# Altium PCB DLP.PcbDoc
Units mil, origin at the board's own origin, x right, y up, seen from the top; angles counter-clockwise.
Board outline 6000 x 4000 mil, 2 copper layers (Top Layer, Bottom Layer); 95 components, 260 nets, 636 pads, 98 vias.
Unrouted connection lines stored in the file: 210.
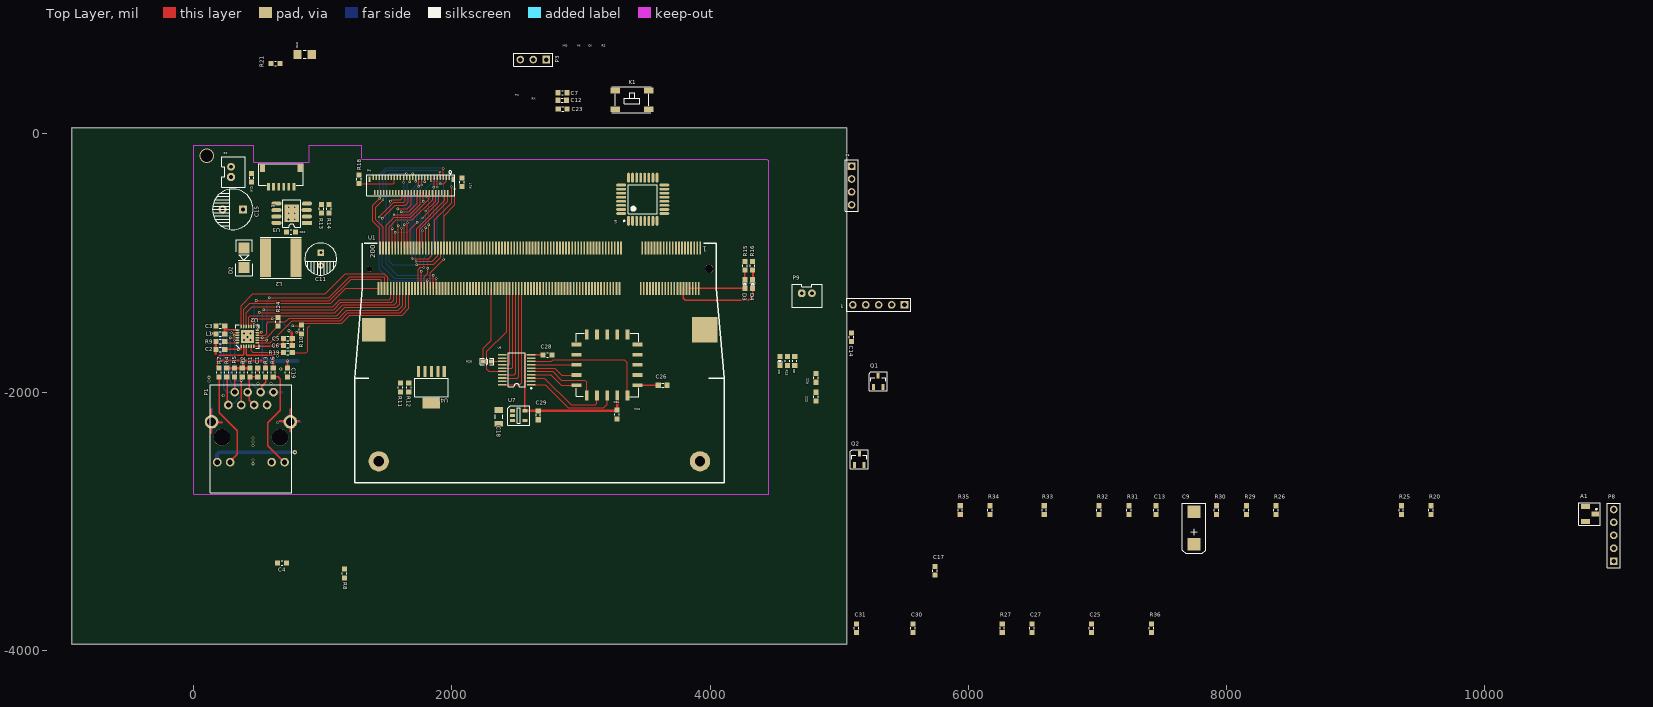
[diagram p0: Top Layer view]
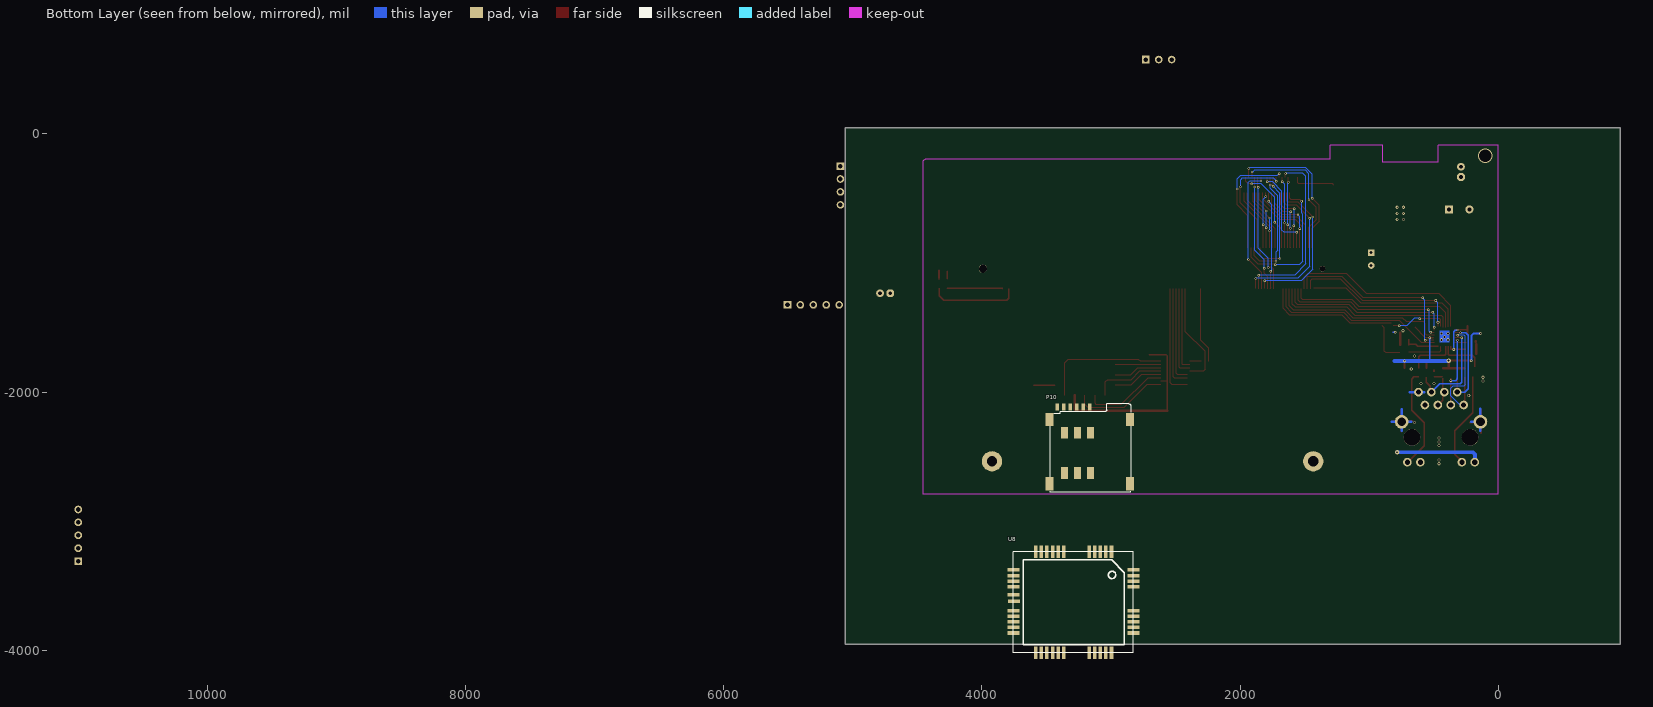
[diagram p1: Bottom Layer view, seen from below]

## Layer stack, top to bottom
Top Solder: solder mask 0.4, Solder Resist, Dk 3.5
Top Layer: signal copper 1.4
Dielectric1: dielectric 12.6, FR-4, Dk 4.8
Bottom Layer: signal copper 1.4
Bottom Solder: solder mask 0.4, Solder Resist, Dk 3.5

## Board outline
-943,-3954 5057,-3954 5057,46 -943,46

## Design rules (kind name [scope] priority, off if disabled: settings)
Clearance [All] p1: gap=6
ComponentClearance [All] p1 off: gap=10 collisioncheckmode=3 verticalgap=10 showdistances=FALSE
FabricationTestPointUsage TestPointUsage [All] p1: valid=0 allowmultiple=FALSE
FabricationTestpoint Testpoint [All] p1: side=3 testpointundercomponent=TRUE minsize=40 maxsize=100 preferedsize=60 minholesize=0 maxholesize=40 preferedholesize=32 testpointgrid=1 allowsidetop=TRUE allowsidebottom=TRUE usegrid=TRUE gridtolerance=0.01
HoleSize [All] p1: absolutevalues=TRUE maxlimit=150 minlimit=1 maxpercent=80.000 minpercent=20.000
PolygonConnect [All] p1: connectstyle=Relief reliefconductorwidth=10 reliefentries=4 polygonreliefangle="90 Angle" airgapwidth=10
RoutingVias [All] p1: holewidth=14 width=28 viastyle="Through Hole" minholewidth=8 minwidth=15 maxholewidth=130 maxwidth=150
SolderMaskExpansion [All] p1: expansion=4
Width [All] p1: maxlimit=100 minlimit=8 preferedwidth=10 minimp=50.000000 maximp=50.000000 favimp=50.000000
26 further rules are at their usual default settings.

## Components (designator, comment, footprint, x,y, rotation, side; value= is the part's Value field where it differs from the comment)
A1 "IPEX" IPEX 10807,-2944 r0 top
C1 "104" 0603 497,-1849 r90 top
C2 "104" 0603 207,-1669 r180 top
C3 "104" 0603 207,-1489 r180 top
C4 "104" 0603 685,-3325 r180 top
C5 "104" 0603 730,-1585 r0 top
C6 "105" 0603 730,-1640 r0 top
C7 "100PF" 0603 2857,318 r180 top
C8 "104" 0603 4655,-1760 r270 top
C9 "Cap Pol3" C7343 7747,-3054 r90 top
C10 "470uF/16V" 3216[1206] 860,615 r0 top
C11 "470uF/16V" C6.3*12 985,-1020 r90 top
C12 "100nF" 0603 2855,260 r180 top
C13 "Cap" 0603 7452,-2914 r90 top
C14 "100nF" 0603 5095,-1575 r90 top
C15 "100uF/35V" C8x4 225,-585 r0 top
C16 "100nF" 0603 450,-340 r270 top
C17 "Cap" 0603 5742,-3384 r90 top
C18 "106" C1206 2364,-2192 r90 top
C19 "104" 0603 727,-1849 r90 top
C20 "10nF" 0603 755,-760 r0 top
C22 "Cap" 0603 4820,-2035 r270 top
C23 "Cap" 0603 2858,191 r0 top
C24 "100NF" 0603 3278,-2173 r90 top
C25 "100NF" 0603 6952,-3829 r90 top
C26 "106" 0603 3632,-1947 r180 top
C27 "106" 0603 6492,-3829 r90 top
C28 "106" 0603 2740,-1712 r0 top
C29 "100NF" 0603 2669,-2180 r270 top
C30 "106" 0603 5572,-3829 r90 top
C31 "106" 0603 5132,-3829 r90 top
D2 "SS34" SMA 390,-960 r270 top
D3 "BLUE" 0603-LED 4269,-1162 r90 top
D4 "BLUE" 0603-LED 4329,-1162 r90 top
D5 "BLUE" 0603-LED 4540,-1760 r270 top
K1 "AJ" 4*4*1.5 3265,335 r0 top
L1 "120 OHM@100MHz" 0603 207,-1549 r180 top
L2 "10uH/4A" 8040 675,-960 r0 top
P1 "HR911105A" HR911105A 417,-2229 r0 top
P2 "CON2" PH2.0-2P 290,-255 r90 top
P3 "" HDR1X3 2730,575 r180 top
P4 "FPC-51PIN" FH26-51S-0.3SHW 1980,-340 r0 top
P5 "DLP-PW" SH1.0-6P 580,-410 r0 top
P6 "CSB" HDR1X4 5095,-250 r270 top
P7 "ISP" HDR1X5 5505,-1325 r180 top
P8 "Header 5" HDR1X5 10997,-3309 r90 top
P9 "CON2" PH2.0-2P 4788,-1235 r0 top
P10 "MircoSIM" "Micro SIM" 3360,-2626 r180 bottom
P11 "CON20" WM8962 3223,-1761 r180 top
Q1 "NPN" SOT-23-NPN 5301,-1917 r0 top
Q2 "NPN" SOT-23-NPN 5155,-2520 r0 top
R1 "10R" 0603 437,-1849 r90 top
R2 "49R9" 0603 377,-1849 r90 top
R3 "49R9" 0603 557,-1849 r90 top
R4 "49R9" 0603 257,-1849 r90 top
R5 "49R9" 0603 317,-1849 r90 top
R6 "1K" 0603 617,-1849 r90 top
R7 "1K" 0603 197,-1849 r90 top
R8 "10K" 0603 1170,-3405 r90 top
R9 "12.1K" 0603 207,-1609 r0 top
R10 "10K" 0603 835,-1515 r270 top
R11 "75K" 0603 1601,-1964 r270 top
R12 "43K" 0603 1666,-1964 r270 top
R13 "4.3KF" 0603 990,-580 r270 top
R14 "1.5KF" 0603 1050,-580 r270 top
R15 "1K" 0603 4269,-1022 r270 top
R16 "1K" 0603 4329,-1022 r270 top
R17 "Res1" 0603 2078,-375 r90 top
R18 "1K" 0603 1282,-352 r270 top
R19 "0R" 0603 730,-1695 r0 top
R20 "Res1" 0603 9582,-2914 r90 top
R21 "1.5K" 0603 635,545 r180 top
R22 "Res1" 0603 4820,-1890 r90 top
R23 "1K" 0603 4600,-1760 r270 top
R24 "10K" 0603 655,-1455 r90 top
R25 "Res1" 0603 9352,-2914 r90 top
R26 "Res1" 0603 8382,-2914 r90 top
R27 "0R" 0603 6262,-3829 r90 top
R28 "33R" 0603R 2272,-1763 r270 top
R29 "Res1" 0603 8152,-2914 r90 top
R30 "Res1" 0603 7922,-2914 r90 top
R31 "Res1" 0603 7242,-2914 r90 top
R32 "Res1" 0603 7012,-2914 r90 top
R33 "Res1" 0603 6587,-2914 r90 top
R34 "Res1" 0603 6167,-2914 r90 top
R35 "Res1" 0603 5937,-2914 r90 top
R36 "1K" 0603 7417,-3829 r90 top
U1 "MAX6-200" "SO-DIMM 200" 2680,-1775 r180 top
U2 "LAN8720A" QFN24_4X4MM 417,-1569 r90 top
U3 "LM22676" SO-8HP 765,-640 r180 top
U4 "TPS73701" SOT223-6 1841,-2084 r180 top
U5 "ATmega48PA" 32A_M 3478,-507 r90 top
U6 "TXS0108" TSSOP-20 2502,-1827 r90 top
U7 "XC6219" SOT23-5N 2518,-2182 r0 top
U8 "G3524" G3524 3055,-3651 r270 bottom

## Footprints (in the part's own frame and the unit in brackets; to place one, negate y for a bottom-side part, rotate by r counter-clockwise, add the part's x,y. Pads: shape width x height; smd on the part's side, far side on the other; paste and mask are expansions set on the pad)
4*4*1.5 [mm]
  rect 1.8x1.1 smd: 1(0,0) 2(6.6,0) 3(0,-3.7) 4(6.6,-3.7)
  silkscreen extent -0.7,-4.4 7.1,0.7
32A_M [mm] "32-Pin Thin Quad Flat Pack 0.8 mm Pitch, IPC Low Density"
  oval 1.95x0.533 smd: 1(-4.25,2.8) 2(-4.25,2) 3(-4.25,1.2) 4(-4.25,0.4) 5(-4.25,-0.4) 6(-4.25,-1.2) 7(-4.25,-2) 8(-4.25,-2.8) 17(4.25,-2.8) 18(4.25,-2) 19(4.25,-1.2) 20(4.25,-0.4) 21(4.25,0.4) 22(4.25,1.2) 23(4.25,2) 24(4.25,2.8)
  oval 0.533x1.95 smd: 9(-2.8,-4.25) 10(-2,-4.25) 11(-1.2,-4.25) 12(-0.4,-4.25) 13(0.4,-4.25) 14(1.2,-4.25) 15(2,-4.25) 16(2.8,-4.25) 25(2.8,4.25) 26(2,4.25) 27(1.2,4.25) 28(0.4,4.25) 29(-0.4,4.25) 30(-1.2,4.25) 31(-2,4.25) 32(-2.8,4.25)
  silkscreen extent -4.37,-2.85 2.85,3.77, body extent -3.5,-3.5 3.5,3.5, height 1.2
0603 [mm]
  rect 1x1 smd: 1(-0.864,0) 2(0.864,0)
  silkscreen extent -0.18,-0.43 0.18,0.43
0603-LED [mm]
  rect 1x1 smd: 1(-0.864,0) 2(0.864,0)
  silkscreen extent -0.18,-0.51 0.18,0.56
0603R [mil]
  rect 31.5x30 smd: 1(0,30) 2(0,-30)
  silkscreen extent -28,-53 28,53
3216[1206] [mm] "Chip Resistor; Body 3.2 x 1.6 mm (LxW typ)"
  rect 1.6x1.8 smd: 1(-1.4,0) 2(1.4,0)
  silkscreen extent -0.3,-0.8 0.3,0.8
8040 [mm]
  rect 2.2x7.5 smd: 1(-3,0) 2(3,0)
  silkscreen extent -4,-4 4,4
C6.3*12 [mm]
  rect 1.3x1.3 hole 0.6: 1(2.54,0)
  round 1.3 hole 0.6: 2(0,0)
  silkscreen extent -1.88,-3.15 4.42,3.15
C8x4 [mm]
  round 1.6 hole 0.8: 1(0,0)
  rect 1.6x1.6 hole 0.8: 2(4,0)
  silkscreen extent -2,-4 6,4
C1206 [mm] "Chip Capacitor, Body 3.2x1.6mm, IPC High Density"
  rect 1.1x1.7 smd: 1(-1.35,0) 2(1.35,0)
  silkscreen extent -0.4,-0.75 0.4,0.75, body extent -1.7,-0.9 1.7,0.9, height 1.3
C7343 [mm] "Molded Capacitor, 2-Leads, Body 7.3x4.3mm, IPC Medium Density"
  rect 2.45x2.5 smd: 1(-3.2,0) 2(3.2,0)
  silkscreen extent -4.95,-2.29 4.95,2.29, body extent -3.75,-2.25 3.75,2.25, height 4.3
FH26-51S-0.3SHW [mm]
  rect 0.45x1 smd: 0(-15.7,-0.3) 0(0.7,-0.3)
  rect 0.3x0.95 smd: 1(0,0.05) 2(-0.3,-2.91) 3(-0.6,0.05) 4(-0.9,-2.91) 5(-1.2,0.05) 6(-1.5,-2.91) 7(-1.8,0.05) 8(-2.1,-2.91) 9(-2.4,0.05) 10(-2.7,-2.91) 11(-3,0.05) 12(-3.3,-2.91) 13(-3.6,0.05) 14(-3.9,-2.91) 15(-4.2,0.05) 16(-4.5,-2.91) 17(-4.8,0.05) 18(-5.1,-2.91) 19(-5.4,0.05) 20(-5.7,-2.91) 21(-6,0.05) 22(-6.3,-2.91) 23(-6.6,0.05) 24(-6.9,-2.91) 25(-7.2,0.05) 26(-7.5,-2.91) 27(-7.8,0.05) 28(-8.1,-2.91) 29(-8.4,0.05) 30(-8.7,-2.91) 31(-9,0.05) 32(-9.3,-2.91) 33(-9.6,0.05) 34(-9.9,-2.91) 35(-10.2,0.05) 36(-10.5,-2.91) 37(-10.8,0.05) 38(-11.1,-2.91) 39(-11.4,0.05) 40(-11.7,-2.91) 41(-12,0.05) 42(-12.3,-2.91) 43(-12.6,0.05) 44(-12.9,-2.91) 45(-13.2,0.05) 46(-13.5,-2.91) 47(-13.8,0.05) 48(-14.1,-2.91) 49(-14.4,0.05) 50(-14.7,-2.91) 51(-15,0.05)
  silkscreen extent -16.2,-3.5 1.1,1.38
G3524 [mm]
  rect 2.4x0.7 smd: 1(-10.55,1.5) 2(-10.55,0.4) 3(-10.55,-0.7) 4(-10.55,-1.8) 5(-10.55,-2.9) 6(-10.55,-7.9) 7(-10.55,-9) 8(-10.55,-10.1) 9(-10.55,-11.2) 10(-10.55,-12.3) 11(-10.55,-13.4) 21(9.35,-13.4) 22(9.35,-12.3) 23(9.35,-11.2) 24(9.35,-10.1) 25(9.35,-9) 26(9.35,-7.9) 27(9.35,-2.9) 28(9.35,-1.8) 29(9.35,-0.7) 30(9.35,0.4) 31(9.35,1.5)
  rect 0.7x2.4 smd: 12(-6.95,-17.75) 13(-5.85,-17.75) 14(-4.75,-17.75) 15(-3.65,-17.75) 16(1.05,-17.75) 17(2.15,-17.75) 18(3.25,-17.75) 19(4.35,-17.75) 20(5.45,-17.75) 32(5.45,5.8) 33(4.35,5.8) 34(3.25,5.8) 35(2.15,5.8) 36(1.05,5.8) 37(-3.65,5.8) 38(-4.75,5.8) 39(-5.85,5.8) 40(-6.95,5.8) 41(-2.1,-17.75) 42(-0.8,-17.7)
  silkscreen extent -10.55,-17.8 9.35,5.8
HDR1X3 [mm] "Connector; Header; 3 Position"
  rect 1.5x1.5 hole 0.9: 1(0,0)
  round 1.5 hole 0.9: 2(2.54,0) 3(5.08,0)
  silkscreen extent -1.27,-1.27 6.35,1.27
HDR1X4 [mm] "Connector; Header; 4 Position"
  rect 1.5x1.5 hole 0.9: 1(0,0)
  round 1.5 hole 0.9: 2(2.54,0) 3(5.08,0) 4(7.62,0)
  silkscreen extent -1.27,-1.27 8.89,1.27
HDR1X5 [mm] "Connector; Header; 5 Position"
  rect 1.5x1.5 hole 0.9: 1(0,0)
  round 1.5 hole 0.9: 2(2.54,0) 3(5.08,0) 4(7.62,0) 5(10.16,0)
  silkscreen extent -1.27,-1.27 11.43,1.27
HR911105A [mm]
  round 1.699 hole 1.001: 1(-3.762,3.275) 2(-2.492,5.815) 3(-1.222,3.275) 4(0.048,5.815) 5(1.318,3.275) 6(2.588,5.815) 7(3.858,3.275) 8(5.128,5.815) 9(-5.937,-7.975) 10(-3.397,-7.975) 11(4.773,-7.975) 12(7.313,-7.975)
  round 2.7 hole 1.7: 13(-7.057,-0.025) 14(8.433,-0.025)
  round 3.3 hole 3.3: ""(-5.027,-3.075) ""(6.403,-3.075)
  silkscreen extent -7.36,-14 8.74,7.3
IPEX [mil] "SOT23, 3-Leads, Body 3.0x2.6mm (max), Pitch 0.95mm, IPC Medium Density"
  rect 59.06x41.34 smd: 1(46.5,-0.5)
  rect 70.87x39.37 smd: 2(-28.5,57.5) 3(-28.5,-57.5)
  silkscreen extent -80,-88 86,88
"Micro SIM" [mm]
  rect 1.55x2.6 smd: 0(-2.95,-2.15) 0(-2.95,10.53) 0(12.85,10.53) 0(12.85,-2.15)
  rect 1.4x2.3 smd: 0(0,0) 0(0,7.92) 0(2.54,0) 0(2.54,7.92) 0(5.08,7.92) 0(5.08,0)
  rect 0.7x1.35 smd: 1(-0.12,12.955) 2(2.42,12.955) 3(4.96,12.955) 5(-1.39,12.955) 6(1.15,12.955) 7(3.69,12.955)
  silkscreen extent -2.82,-3.82 13.05,13.58
PH2.0-2P [mil]
  oct 60x60 hole 30: 1(-78.74,0)
  round 60 hole 30: 2(0,0)
  silkscreen extent -157,-110 79,70
QFN24_4X4MM [mil]
  oval 28x11 smd: 1(-77.01,49.21) 2(-77.01,29.53) 3(-77.01,9.84) 4(-77.01,-9.84) 5(-77.01,-29.53) 6(-77.01,-49.21) 13(77.01,-49.21) 14(77.01,-29.53) 15(77.01,-9.84) 16(77.01,9.84) 17(77.01,29.53) 18(77.01,49.21)
  oval 11x28 smd: 7(-49.21,-77.01) 8(-29.53,-77.01) 9(-9.84,-77.01) 10(9.84,-77.01) 11(29.53,-77.01) 12(49.21,-77.01) 19(49.21,77.01) 20(29.53,77.01) 21(9.84,77.01) 22(-9.84,77.01) 23(-29.53,77.01) 24(-49.21,77.01)
  rect 103x103 smd: 25(0,0)
  silkscreen extent -91,-91 91,91
SH1.0-6P [mm]
  rect 1x1.5 smd: 0(-1.175,3.63) 0(6.175,3.63)
  rect 0.55x1.55 smd: 1(0,0) 2(1,0) 3(2,0) 4(3,0) 5(4,0) 6(5,0)
  silkscreen extent -1.88,0.25 6.88,4.57
SMA [mm] "Molded Diode, 2-Leads, Body 4.3x2.7mm, IPC Medium Density"
  rect 2.15x2.15 smd: 1(-1.93,0) 2(1.93,0)
  silkscreen extent -3.56,-1.65 3.56,1.65, body extent -2.28,-1.42 2.29,1.42, height 2.95
SO-8HP [mm]
  rect 2x0.8 smd: 1(-2.847,1.29)
  oval 2x0.8 smd: 2(-2.847,0.02) 3(-2.813,-1.275) 4(-2.847,-2.52) 5(3.153,-2.52) 6(3.153,-1.25) 7(3.153,0.02) 8(3.153,1.265)
  rect 2.8x3.4 smd: 9(0.128,-0.615)
  silkscreen extent -1.55,-3.31 1.85,2.09
"SO-DIMM 200" [mm]
  round 1.6 hole 1.6: 0(-33.337,-18.553)
  rect 5x5 smd: 0(-32.487,-6.553)
  rect 4.572x4.572 smd: 0(32.613,-6.553)
  round 1.1 hole 1.1: 0(33.463,-18.553)
  rect 0.35x2.55 smd: 1(-31.587,-22.653) 2(-31.287,-14.653) 3(-30.987,-22.653) 4(-30.687,-14.653) 5(-30.387,-22.653) 6(-30.087,-14.653) 7(-29.787,-22.653) 8(-29.487,-14.653) 9(-29.187,-22.653) 10(-28.887,-14.653) 11(-28.587,-22.653) 12(-28.287,-14.653) 13(-27.987,-22.653) 14(-27.687,-14.653) 15(-27.387,-22.653) 16(-27.087,-14.653) 17(-26.787,-22.653) 18(-26.487,-14.653) 19(-26.187,-22.653) 20(-25.887,-14.653) 21(-25.587,-22.653) 22(-25.287,-14.653) 23(-24.987,-22.653) 24(-24.687,-14.653) 25(-24.387,-22.653) 26(-24.087,-14.653) 27(-23.787,-22.653) 28(-23.487,-14.653) 29(-23.187,-22.653) 30(-22.887,-14.653) 31(-22.587,-22.653) 32(-22.287,-14.653) 33(-21.987,-22.653) 34(-21.687,-14.653) 35(-21.387,-22.653) 36(-21.087,-14.653) 37(-20.787,-22.653) 38(-20.487,-14.653) 39(-20.187,-22.653) 40(-19.887,-14.653) 41(-15.987,-22.653) 42(-15.687,-14.653) 43(-15.387,-22.653) 44(-15.087,-14.653) 45(-14.787,-22.653) 46(-14.487,-14.653) 47(-14.187,-22.653) 48(-13.887,-14.653) 49(-13.587,-22.653) 50(-13.287,-14.653) 51(-12.987,-22.653) 52(-12.687,-14.653) 53(-12.387,-22.653) 54(-12.087,-14.653) 55(-11.787,-22.653) 56(-11.487,-14.653) 57(-11.187,-22.653) 58(-10.887,-14.653) 59(-10.587,-22.653) 60(-10.287,-14.653) 61(-9.987,-22.653) 62(-9.687,-14.653) 63(-9.387,-22.653) 64(-9.087,-14.653) 65(-8.787,-22.653) 66(-8.487,-14.653) 67(-8.187,-22.653) 68(-7.887,-14.653) 69(-7.587,-22.653) 70(-7.287,-14.653) 71(-6.987,-22.653) 72(-6.687,-14.653) 73(-6.387,-22.653) 74(-6.087,-14.653) 75(-5.787,-22.653) 76(-5.487,-14.653) 77(-5.187,-22.653) 78(-4.887,-14.653) 79(-4.587,-22.653) 80(-4.287,-14.653) 81(-3.987,-22.653) 82(-3.687,-14.653) 83(-3.387,-22.653) 84(-3.087,-14.653) 85(-2.787,-22.653) 86(-2.487,-14.653) 87(-2.187,-22.653) 88(-1.887,-14.653) 89(-1.587,-22.653) 90(-1.287,-14.653) 91(-0.987,-22.653) 92(-0.687,-14.653) 93(-0.387,-22.653) 94(-0.087,-14.653) 95(0.213,-22.653) 96(0.513,-14.653) 97(0.813,-22.653) 98(1.113,-14.653) 99(1.413,-22.653) 100(1.713,-14.653) 101(2.013,-22.653) 102(2.313,-14.653) 103(2.613,-22.653) 104(2.913,-14.653) 105(3.213,-22.653) 106(3.513,-14.653) 107(3.813,-22.653) 108(4.113,-14.653) 109(4.413,-22.653) 110(4.713,-14.653) 111(5.013,-22.653) 112(5.313,-14.653) 113(5.613,-22.653) 114(5.913,-14.653) 115(6.213,-22.653) 116(6.513,-14.653) 117(6.813,-22.653) 118(7.113,-14.653) 119(7.413,-22.653) 120(7.713,-14.653) 121(8.013,-22.653) 122(8.313,-14.653) 123(8.613,-22.653) 124(8.913,-14.653) 125(9.213,-22.653) 126(9.513,-14.653) 127(9.813,-22.653) 128(10.113,-14.653) 129(10.413,-22.653) 130(10.713,-14.653) 131(11.013,-22.653) 132(11.313,-14.653) 133(11.613,-22.653) 134(11.913,-14.653) 135(12.213,-22.653) 136(12.513,-14.653) 137(12.813,-22.653) 138(13.113,-14.653) 139(13.413,-22.653) 140(13.713,-14.653) 141(14.013,-22.653) 142(14.313,-14.653) 143(14.613,-22.653) 144(14.913,-14.653) 145(15.213,-22.653) 146(15.513,-14.653) 147(15.813,-22.653) 148(16.113,-14.653) 149(16.413,-22.653) 150(16.713,-14.653) 151(17.013,-22.653) 152(17.313,-14.653) 153(17.613,-22.653) 154(17.913,-14.653) 155(18.213,-22.653) 156(18.513,-14.653) 157(18.813,-22.653) 158(19.113,-14.653) 159(19.413,-22.653) 160(19.713,-14.653) 161(20.013,-22.653) 162(20.313,-14.653) 163(20.613,-22.653) 164(20.913,-14.653) 165(21.213,-22.653) 166(21.513,-14.653) 167(21.813,-22.653) 168(22.113,-14.653) 169(22.413,-22.653) 170(22.713,-14.653) 171(23.013,-22.653) 172(23.313,-14.653) 173(23.613,-22.653) 174(23.913,-14.653) 175(24.213,-22.653) 176(24.513,-14.653) 177(24.813,-22.653) 178(25.113,-14.653) 179(25.413,-22.653) 180(25.713,-14.653) 181(26.013,-22.653) 182(26.313,-14.653) 183(26.613,-22.653) 184(26.913,-14.653) 185(27.213,-22.653) 186(27.513,-14.653) 187(27.813,-22.653) 188(28.113,-14.653) 189(28.413,-22.653) 190(28.713,-14.653) 191(29.013,-22.653) 192(29.313,-14.653) 193(29.613,-22.653) 194(29.913,-14.653) 195(30.213,-22.653) 196(30.513,-14.653) 197(30.813,-22.653) 198(31.113,-14.653) 199(31.413,-22.653) 200(31.713,-14.653)
  round 4 hole 2: 201(-31.53,19.336) 202(31.657,19.336)
  silkscreen extent -36.29,-23.55 36.41,23.57
SOT23-5N [mm]
  rect 1.05x0.65 smd: 1(-1.225,0.95) 2(-1.225,0) 3(-1.225,-0.95) 4(1.225,-0.95) 5(1.225,0.95)
  silkscreen extent -2.16,-1.91 2.16,1.91, body extent -0.87,-1.5 0.88,1.5, height 1.1
SOT223-6 [mm]
  rect 0.6x2.2 smd: 1(-2.54,-6.2) 2(-1.27,-6.2) 3(0,-6.2) 4(1.27,-6.2) 5(2.54,-6.2)
  rect 3.5x2.2 smd: 6(0,0)
  silkscreen extent -3.3,-4.9 3.3,-1.17
SOT-23-NPN [mm]
  rect 0.6x1.143 smd: 1(0.95,-1.108) 2(-0.95,-1.108) 3(0,1.108)
  silkscreen extent -1.75,-1.89 1.75,1.87, body extent -1.5,-0.66 1.5,0.74, height 1.1
TSSOP-20 [mm]
  rect 0.3x1.6 smd: 1(-2.925,-2.85) 2(-2.275,-2.85) 3(-1.625,-2.85) 4(-0.975,-2.85) 5(-0.325,-2.85) 6(0.325,-2.85) 7(0.975,-2.85) 8(1.625,-2.85) 9(2.275,-2.85) 10(2.925,-2.85) 11(2.925,2.85) 12(2.275,2.85) 13(1.625,2.85) 14(0.975,2.85) 15(0.325,2.85) 16(-0.325,2.85) 17(-0.975,2.85) 18(-1.625,2.85) 19(-2.275,2.85) 20(-2.925,2.85)
  silkscreen extent -3.75,-2.97 3.3,1.65
WM8962 [mm]
  rect 0.71x2 smd: 1(4.528,6.718) 2(2.528,6.718) 3(0.528,6.718) 4(-1.472,6.718) 5(-3.472,6.718) 11(-3.472,-5.282) 12(-1.472,-5.282) 13(0.528,-5.282) 14(2.528,-5.282) 15(4.528,-5.282)
  rect 2x0.71 smd: 6(-5.472,4.718) 7(-5.472,2.718) 8(-5.472,0.718) 9(-5.472,-1.282) 10(-5.472,-3.282) 16(6.528,-3.282) 17(6.528,-1.282) 18(6.528,0.718) 19(6.528,2.718) 20(6.528,4.718)
  silkscreen extent -5.69,-5.46 6.63,6.96

## Part data
C1 C2 C3 C4 C5 C6 C8 C18 C26 C27 C28 C30 C31: library part CAP
C7 C12 C14 C16 C20: library part Cap, "Capacitor"
C9: "Polarized Capacitor (Surface Mount)"
C10 C11 C15: library part "Cap Pol1", "Polarized Capacitor (Radial)"
C13 C17 C22 C23: "Capacitor"
C19 C24 C25 C29: library part Cap
D2: library part "Diode 1N5408", "3 Amp Medium Power Silicon Rectifier Diode"
D3 D4 D5: library part LED2, "Typical RED, GREEN, YELLOW, AMBER GaAs LED"
K1: library part KEY_1
L1 L2: library part Inductor, "Inductor"
P3: library part CON3, "Connector"
P5: library part "Header 6", "Header, 6-Pin"
P6: library part "Header 4", "Header, 4-Pin"
P7: library part "Header 5", "Header, 5-Pin"
P8: "Header, 5-Pin"
Q1 Q2: library part 2N5551, "NPN General Purpose Amplifier"
R1 R2 R3 R4 R5 R6 R7 R8 R9 R10 R19 R21 R24 R27 R28: library part RES
R11 R12: library part Res2, "Resistor"
R13 R14 R15 R16 R18 R23 R36: library part Res1, "Resistor"
R17 R20 R22 R25 R26 R29 R30 R31 R32 R33 R34 R35: "Resistor"
U4: library part TPS737
U5: library part ATmega8-16AC, "8-Bit AVR Microcontroller with 8K Bytes of In-System Programmable Flash Memory"

## Via types
v1: diameter 18, hole 10, Top Layer to Bottom Layer, 54 vias
v2: diameter 24, hole 15, Top Layer to Bottom Layer, 19 vias
v3: diameter 20, hole 12, Top Layer to Bottom Layer, 13 vias
v4: diameter 23.62, hole 11.81, Top Layer to Bottom Layer, 5 vias
v5: diameter 35, hole 15, Top Layer to Bottom Layer, 2 vias
v6: diameter 23.62, hole 14, Top Layer to Bottom Layer, 1 vias
v7: diameter 110, hole 100, Top Layer to Bottom Layer, 1 vias
v8: diameter 23, hole 13, Top Layer to Bottom Layer, 1 vias
v9: diameter 22, hole 13, Top Layer to Bottom Layer, 1 vias
v10: diameter 22, hole 12, Top Layer to Bottom Layer, 1 vias

## Nets (pads, with @x,y where several pads share a name; then routed paths per layer and width w, separated by ;. In a path a pad name is that pad's centre, name@x,y a point inside that pad or via, vN(x,y) a via of type N, cw(c..) or ccw(c..) an arc to the next point about the centre after c; other vN are vias at no path point)
3P3V: D4.1 U1.12 U1.14 U1.16 U1.18 U4.5 | length 688.3
  Top Layer w10: U1.12 3793.65,-1273.65 3808,-1288 4294,-1288 4329,-1253 D4.1
5VIN: C11.1 C12.2 C18.1 D3.1 L2.2 R13.2 R18.1 U1.2 U1.4 U1.6 U1.8 U1.10 U4.1 | length 429
  Top Layer w12: U1.8 3842.99,-1196 D3.1
+3.3V: C9.1 C13.2 C25.1 U6.19 U8.33 U8.34
+5V: C27.2 C30.1 C31.1 P11.14 U7.1 U7.3
+12: C15.2 C16.2 P2.1 P5.1 P5.2 P5.3 U3.7
AUD3_RXD: U1.114 U6.14 | length 646.3
  Top Layer w8: U6.14 2444.39,-1788.61 2447.19,-1785.81 U1.114
AUD3_TXC: U1.110 U6.17 | length 746
  Top Layer w8: U6.17@2410,-1865.39 2484.61,-1865.39 2494.43,-1855.57 U1.110
AUD3_TXD: U1.112 U6.15 | length 693
  Top Layer w8: U6.15 2463.8,-1814.2 2470.81,-1807.19 U1.112
AUD3_TXFS: U1.116 U6.16 | length 813.6
  Top Layer w8: U6.16 2286.8,-1839.8 2272,-1825 2272,-1685 2423.57,-1533.43 U1.116
AUD_1V8: C24.2 C28.1 C29.1 P11.4 U6.2 U6.10 U7.5 | length 1436.5
  Top Layer w8: 2565,-1916.57 U6.2
  Top Layer w12: U7.5@2563,-2140 2563,-1721 2572.16,-1711.84 C28.1@2703,-1711.84
  Top Layer w20: U7.5@2564,-2145 C24.2@3277,-2145 ; C24.2@3280.96,-2137 P11.4
AUDIO_CLK: R28.1 U6.13 | length 87.8
  Top Layer w8: R28.1 U6.13
CAN1_RX: U1.119
CAN1_TX: U1.117
CAN2_RX: U1.124
CAN2_TX: U1.122
CLK1_N: U1.84
CLK1_P: U1.82
CPUSYNC: P4.1 R17.2
CSB_CS: P6.3 U5.11
CSB_SIG: P6.2 U5.12
CSI0_DAT12: U1.107
CSI0_DAT13: U1.105
CSI0_DAT14: U1.99
CSI0_DAT15: U1.115
CSI0_DAT16: U1.97
CSI0_DAT17: U1.95
CSI0_DAT18: U1.103
CSI0_DAT19: U1.101
CSI0_DATA_EN/VOL-: U1.24
CSI0_HSYNCH: U1.113
CSI0_PIXCLK: U1.111
CSI0_VSYNCH: U1.109
CSI_CLK0M: U1.85
CSI_CLK0P: U1.87
CSI_D0M: U1.81
CSI_D0P: U1.83
CSI_D1M: U1.77
CSI_D1P: U1.79
CSPI1_CLK: U1.47
CSPI1_CS0: U1.41
CSPI1_MISO: U1.43
CSPI1_MOSI: U1.45
CSPI1_RDY: U1.49
CSPI2_CLK: U1.31
CSPI2_CS0: U1.25
CSPI2_CS1: U1.33
CSPI2_MISO: U1.35
CSPI2_MOSI: U1.29
CSPI2_RDY: U1.27
DISP0_CLK: P4.3 U1.179 | length 718.8
  Top Layer w8: U1.179 1679.47,-737.53 v1(1732,-685) ; v1(1909,-388) 1936.67,-388 1956.38,-368.29 P4.3
  Bottom Layer w8: v1(1732,-685) 1732,-492 1836,-388 v1(1909,-388)
DISP0_CONTRAST: U1.177
DISP0_DAT0: P4.7 U1.197 | length 1122.1
  Top Layer w8: U1.197 1466.87,-724.87 1409,-667 1409,-568.87 v1(1466.87,-511) ; v1(1907.5,-296) 1907.5,-336.4 P4.7
  Bottom Layer w8: v1(1466.87,-511) 1466.87,-308.13 1492,-283 1891,-283 1904,-296 v1(1907.5,-296)
DISP0_DAT1: P4.8 U1.171 | length 478.8
  Top Layer w8: U1.171@1772.5,-881.68 v1(1772.5,-750) ; v1(1772.5,-652.5) 1897.32,-527.68 P4.8
  Bottom Layer w8: v1(1772.5,-750) v1(1772.5,-652.5)
DISP0_DAT2: P4.9 U1.170 | length 900.5
  Top Layer w8: U1.170 1785.77,-1106.23 1813,-1079 v1(1813,-1042) ; v1@1885.51,-410.51 P4.9
  Bottom Layer w8: v1(1813,-1042) 1813,-977 1887,-903 v1(1887,-412)
DISP0_DAT3: P4.10 U1.169 | length 460.1
  Top Layer w8: U1.169 v1(1797.58,-727.42) ; v1(1797.58,-597.42) 1873.7,-521.3 P4.10
  Bottom Layer w8: v1(1797.58,-727.42) v1(1797.58,-597.42)
DISP0_DAT4: P4.11 U1.174 | length 924.9
  Top Layer w8: U1.174 1738.53,-1050.47 1754,-1035 v1(1782,-1035) ; v1@1861.89,-411.11 P4.11
  Bottom Layer w8: v1(1782,-1035) 1782,-963 1860,-885 v1(1860,-413)
DISP0_DAT5: P4.12 U1.193 | length 664.2
  Top Layer w8: U1.193@1514,-888 1514,-722 1570,-666 1693,-666 1850.08,-508.92 P4.12 ; U1.193@1514.12,-855 U1.193@1514.12,-835.54
DISP0_DAT6: P4.13 U1.166 | length 995
  Top Layer w8: U1.166 1833.02,-1075.98 v1(1936,-973) ; v1(1838,-366) 1838.27,-365.73 P4.13
  Bottom Layer w8: v1(1838,-366) 1926,-366 1936,-376 v1(1936,-973)
DISP0_DAT7: P4.14 U1.195 | length 644.5
  Top Layer w8: U1.195 1490.5,-709.5 1552,-648 1683,-648 1826.46,-504.54 P4.14
DISP0_DAT8: P4.16 U1.167 | length 441.1
  Top Layer w8: v1(1802,-485) P4.16@1802,-455.4 ; U1.167 v1(1821.2,-703.8)
  Bottom Layer w8: v1(1802,-485) 1802,-486 1821,-505 1821,-705 v1@1824,-708
DISP0_DAT9: P4.17 U1.189 | length 722
  Top Layer w8: U1.189 v1(1561.36,-762) ; v1(1791,-371) P4.17@1791,-338.06
  Bottom Layer w8: v1(1561.36,-762) 1659,-762 1676,-745 1676,-444 1749,-371 v1(1791,-371)
DISP0_DAT10: P4.18 U1.172 | length 760.3
  Top Layer w8: U1.172 1762,-1197.95 1765,-1194.95 1764,-1193.95 v1(1764,-1064) ; v1(1779.21,-521.79) P4.18
  Bottom Layer w8: v1(1764,-1064) 1753.5,-1053.5 1753.5,-547.5 v1(1779.21,-521.79)
DISP0_DAT11: P4.19 U1.161 | length 921.4
  Top Layer w8: v1(1722,-987) 1849,-987 1892.07,-943.93 U1.161 ; v1(1767.4,-397) P4.19
  Bottom Layer w8: v1@1722,-982 1722,-914 1710,-902 1710,-480 1767.4,-422.6 v1(1767.4,-397)
DISP0_DAT12: P4.20 U1.191 | length 589.7
  Top Layer w8: U1.191 v1(1537.74,-734) ; v1(1552,-628) 1673,-628 1755.59,-545.41 P4.20
  Bottom Layer w8: v1(1537.74,-734) 1537.74,-642.26 v1(1552,-628)
DISP0_DAT13: P4.21 U1.165 | length 871.2
  Top Layer w8: v1(1692,-966) 1821,-966 1844.83,-942.17 U1.165 ; v1@1743.78,-407 P4.21
  Bottom Layer w8: v1(1692,-966) 1692,-459 v1(1744,-407)
DISP0_DAT14: P4.22 U1.185 | length 513.1
  Top Layer w8: v1(1608,-603) 1667,-603 1731.97,-538.03 P4.22 ; U1.185 1610,-881.75 v1(1610,-732)
  Bottom Layer w8: v1(1610,-732) v1@1610,-605
DISP0_DAT15: P4.23 U1.163 | length 903.3
  Top Layer w8: v1@1720.16,-366.84 P4.23 ; U1.163 1868.45,-664.55 1998,-535 v1@1998,-411
  Bottom Layer w8: v1@1717,-368 1740,-345 1987,-345 1997,-355 v1(1997,-410)
  other v1: 1720,-367
DISP0_DAT16: P4.25 U1.157 | length 939.8
  Top Layer w8: P4.25 1696.54,-309.46 v1(1697,-309) ; U1.157 1939.31,-632.69 2022,-550 v1(2022,-428)
  Bottom Layer w8: v1(1697,-309) 1699,-309 1716,-326 2000,-326 2022,-348 v1(2022,-428)
DISP0_DAT17: P4.26 U1.187 | length 511.7
  Top Layer w8: v1(1581,-581) 1654,-581 1684.72,-550.28 P4.26 ; v1(1584,-711) 1584,-882.16 U1.187
  Bottom Layer w8: v1@1581,-708.02 v1(1581,-581)
DISP0_DAT18: P4.27 U1.181 | length 552.1
  Top Layer w8: U1.181 1656,-882.99 v1(1656,-689) ; v1@1672.91,-371.91 P4.27
  Bottom Layer w8: v1(1656,-689) 1656,-389 v1(1673,-372)
DISP0_DAT19: P4.28 U1.162 | length 1232.4
  Top Layer w8: v1@1462,-653 1563,-552 1638,-552 1661.1,-528.9 P4.28 ; U1.162@1879,-1196.84 1880,-1195.84 v1(1880,-1120)
  Bottom Layer w8: v1(1461,-653) 1461,-1025 1555,-1119 1879,-1119 v1(1880,-1120)
DISP0_DAT20: P4.29 U1.164 | length 1377.6
  Top Layer w8: P4.29 v1@1649.29,-308.29 ; U1.164 v1(1856.64,-1095)
  Bottom Layer w8: v1(1648,-307) 1514,-307 1492,-329 1492,-1008 1579,-1095 v1(1856.64,-1095)
DISP0_DAT21: P4.30 U1.168 | length 1189.7
  Top Layer w8: v1@1438,-647 1438,-644 1551,-531 1628,-531 1637.48,-521.52 P4.30 ; U1.168@1809,-1197.71 v1(1809,-1138)
  Bottom Layer w8: v1@1438,-647 1438,-1049 1527,-1138 v1(1809,-1138)
  other v1: 1437,-644
DISP0_DAT22: P4.31 U1.183 | length 547.4
  Top Layer w8: v1@1625.67,-375.67 P4.31 ; v1(1632,-705) 1632,-882.91 U1.183
  Bottom Layer w8: v1(1626,-376) 1632,-382 v1(1632,-705)
DISP0_DAT23: P4.32 U1.159 | length 1121.2
  Top Layer w8: v1(1524,-523) 1536,-511 1603,-511 1613.86,-500.14 P4.32 ; v1(1729,-1014) 1731,-1012 1859,-1012 1915.69,-955.31 U1.159
  Bottom Layer w8: v1(1524,-523) 1524,-611.13 1514,-621.13 1514,-985 1543,-1014 v1(1729,-1014)
DISP0_DRDY: P4.2 U1.173 | length 518.8
  Top Layer w8: U1.173 1750.34,-739.66 1968.19,-521.81 P4.2
DISP0_HSYNCH: P4.5 U1.199 | length 1201.1
  Top Layer w8: v1(1442,-499) 1386,-555 1386,-676 1442,-732 1442,-881.89 U1.199 ; P4.5 1933,-337.79 v1(1933,-269)
  Bottom Layer w8: v1(1442,-499) 1442,-313.2 1493.2,-262 1926,-262 v1(1933,-269)
DISP0_VSYNCH: P4.4 U1.175 | length 518.8
  Top Layer w8: U1.175 1726.72,-733.28 1944.57,-515.43 P4.4
EIM_BCLK/VOL+: U1.22
EIM_D20: R27.2 U1.23
ENET0_100MLED2: R7.2 U2.2 | length 344
  Top Layer w10: R7.2@184,-1802 184,-1734 204,-1714 381,-1714 387.47,-1707.53 U2.2
ENET0_LINKLED1: R6.2 U2.3 | length 367.2
  Top Layer w10: U2.3 407.16,-1705.16 416.16,-1714.16 606.16,-1714.16 617,-1725 R6.2
ENET_CRS_DV: U1.190 U2.11 | length 1340.2
  Top Layer w8: U2.11@499,-1539.47 v3@526.47,-1539.47 ; v3@545,-1361 1084,-1361 1140,-1305 1534.55,-1305 1549.55,-1290 U1.190
  Bottom Layer w8: v3@524,-1539 535,-1528 535,-1370 543,-1362 v3@545,-1362
  other v3: 525,-1537 543,-1361
ENET_MDC: U1.198 U2.13 | length 1316.9
  Top Layer w8: v3@466,-1457 v3@466.21,-1457.21 ; U2.13@467,-1488.79 v3@467,-1457 ; v3@484,-1293 1052,-1293 1220,-1125 1445,-1125 1455.06,-1135.06 U1.198
  Bottom Layer w8: v3@466,-1459 468,-1457 468,-1309 v3@486.5,-1290.5
  other v3: 468,-1459 486,-1291
ENET_MDIO: R21.1 U1.188 U2.12 | length 1348
  Top Layer w8: U2.12@497,-1519.79 v3(497,-1499) ; v3@510,-1385 1095,-1385 1155,-1325 1553.17,-1325 1573.17,-1305 U1.188
  Bottom Layer w8: v3(497,-1499) 497,-1393 505.5,-1384.5 v3@511.5,-1384.5
  other v3: 507,-1383
ENET_NINT: R10.1 U1.180 U2.14 | length 1485.8
  Top Layer w8: U2.14@446.21,-1491 446.21,-1440.79 456,-1431 v3@611,-1431 ; v3@767,-1486 815,-1486 ; R10.1@830,-1466 1149,-1466 1210,-1405 1615,-1405 1667.66,-1352.34 U1.180
  Bottom Layer w8: v3@612,-1430 653,-1430 708,-1485 v3@769,-1485
  other v3: 769,-1486 610,-1431
ENET_NRST: R24.2 U1.186 U2.15 | length 1428.7
  Top Layer w8: U2.15@426,-1498 427,-1497 427,-1419 439,-1407 1108,-1407 1170,-1345 1570,-1345 1595,-1320 ; 1582.5,-1332.5 1596.8,-1318.2 U1.186
ENET_REF_CLK: R19.2 U1.178 | length 328.8
  Top Layer w8: R19.2@764,-1696 869,-1696 883,-1682 883,-1502 900,-1485
ENET_RX_ER: R8.2 U1.184 U2.10 | length 1395
  Top Layer w8: U2.10@498,-1560 500,-1558 554,-1558 565,-1547 565,-1469 579,-1455 711,-1455 739,-1427 1123,-1427 1185,-1365 1585,-1365 1620.42,-1329.58 U1.184
ENET_RXD0: U1.196 U2.8 | length 1451
  Top Layer w8: U2.8@501,-1598 v3@567,-1598 ; v3@585,-1269 1046,-1269 1210,-1105 1475,-1105 1478.68,-1108.68 U1.196
  Bottom Layer w8: v3@567,-1598 569,-1596 569,-1289 v3@585,-1273
  other v3: 568,-1598 586,-1270
ENET_RXD1: U1.182 U2.7 | length 1406.7
  Top Layer w8: U2.7@495,-1618 593,-1618 765,-1446 1134,-1446 1195,-1385 1600,-1385 1644.04,-1340.96 U1.182
ENET_TX_EN: U1.192 U2.16 | length 1354.1
  Top Layer w8: U2.16@406,-1499 407,-1498 407,-1387 455,-1339 1076,-1339 1130,-1285 1515,-1285 1525.93,-1274.07 U1.192
ENET_TXD0: U1.200 U2.17 | length 1244.9
  Top Layer w8: U2.17@388,-1494 388,-1359 433,-1314 1061,-1314 1180,-1195 U1.200@1430,-1195
ENET_TXD1: U1.194 U2.18 | length 1493.3
  Top Layer w8: U2.18@368,-1491 368,-1331 459,-1240 1020,-1240 1175,-1085 1475,-1085 1502.31,-1112.31 U1.194
ETH_RXN0: P1.6 R3.1 U2.22 | length 813.8
  Top Layer w8: v1(283,-1578.84) U2.22
  Top Layer w10: P1.6@529,-2018 529,-1953 559,-1923 R3.1@559,-1885
  Bottom Layer w10: v1(283,-1578.84) 283,-1922 296,-1935 453.8,-1935 P1.6
ETH_RXP0: P1.3 R2.1 U2.23 | length 586.8
  Top Layer w8: v1(317,-1598.53) U2.23
  Top Layer w10: P1.3@369,-2100 R2.1@369,-1893
  Bottom Layer w10: v1(317,-1598.53) 317,-1898 330,-1911 v1(369,-1911)
ETH_TXN0: P1.2 R5.1 U2.20 | length 742.8
  Top Layer w8: v1(294,-1539.47) U2.20
  Top Layer w10: P1.2@319,-2000 R5.1@319,-1882
  Bottom Layer w10: v1(294,-1539.47) 253.53,-1539.47 234,-1559 234,-1974 260.08,-2000.08 P1.2
ETH_TXP0: P1.1 R4.1 U2.21 | length 986.1
  Top Layer w8: v1(316,-1559.16) U2.21
  Top Layer w10: P1.1@262,-2108 R4.1@262,-1885
  Bottom Layer w8: P1.1@278,-2108 287,-2108 368,-2027 368,-1970 352,-1954 269,-1954 258,-1943 258,-1567 265.84,-1559.16 v1(316,-1559.16)
  Bottom Layer w10: v1(316,-1559.16) v1@316.16,-1559.16
FEC_A3V2: C2.1 C3.1 L1.1 U2.1 U2.19 | length 471.4
  Top Layer w10: 241.01,-1519 U2.19@341,-1519 ; C2.1@252,-1669 364.79,-1669 367.79,-1666 U2.1
  Top Layer w15: L1.1 C3.1
  Bottom Layer w10: v1@314,-1520 333,-1520 346,-1533 v10@346,-1670
  other v1: 317,-1519
  other v10: 346,-1669
GEN_3V3: C4.2 C8.2 C10.1 C14.2 C19.2 D5.1 L1.2 P1.9 P6.4 R1.2 R2.2 R3.2 R4.2 R5.2 R10.2 R11.2 R21.2 R22.2 R24.1 U2.9 U4.2 U5.4 U5.6 U5.18 | length 2429
  Top Layer w8: v3@533,-1578 567,-1578 R24.1@645.5,-1499.5
  Top Layer w10: v3(800,-1536) R10.2@820,-1536
  Top Layer w12: U2.9@503,-1579 v3@530,-1579
  Top Layer w15: v8@135,-1547 L1.2@171,-1547 ; v9@215,-1757 v5@384,-1757 ; v5@385,-1755 536,-1755 557,-1776 R3.2 ; C19.2 v3@727,-1762
  Top Layer w20: R4.2@264,-1816 R1.2@427,-1816 ; R2.2@385,-1805 v5@385,-1755
  Bottom Layer w10: v3(800,-1536) 817,-1536
  Bottom Layer w12: 532,-1748 v3@532,-1576
  Bottom Layer w15: v8@138,-1548 195,-1548 209,-1562 v9@209,-1756
  Bottom Layer w30: P1.9@180,-2543 180,-2484 198,-2466 v5(784,-2466) ; v5@388,-1758 804,-1758
  other v3: 727,-1759 532,-1578
  other v5: 386,-1757
  other v8: 137,-1547
  other v9: 210,-1757
GND: A1.2 A1.3 C1.2 C2.2 C3.2 C4.1 C5.2 C6.2 C7.1 C8.1 C9.2 C10.2 C11.2 C12.1 C13.1 C14.1 C15.1 C16.1 C17.2 C18.2 C19.1 C22.2 C23.2 C24.1 C25.2 C26.1 C27.1 C28.2 C29.2 C30.2 C31.2 D2.1 K1.1 K1.2 P1.8 P1.11 P1.13 P1.14 P2.2 P3.3 P4.6 P4.15 P4.24 P4.33 P4.44 P4.50 P4.51 P5.4 P5.5 P5.6 P6.1 P7.1 P8.1 P10.5 P11.7 P11.8 P11.15 Q1.1 Q2.1 R8.1 R9.1 R12.2 R14.2 R15.1 R16.1 R17.1 R27.1 U1.1 U1.3 U1.5 U1.7 U1.9 U1.51 U1.65 U1.93 U1.128 U1.149 U1.176 U1.201 U1.202 U2.25 U3.6 U3.9 U4.3 U4.6 U5.3 U5.5 U5.21 U6.11 U7.2 U8.1 U8.31 U8.35 U8.36 U8.37 U8.38 U8.40 | length 1397.1
  Top Layer w16: 135,-2315 135,-2135 ; P1.13@160,-2235 220,-2235 ; 665,-2225 815,-2225 ; 750,-2305 750,-2135
  Top Layer w20: 173,-1702 173,-1629 ; R9.1@174.72,-1609.12 R9.1@175,-1605 ; C6.2@760,-1635 760,-1540
  Bottom Layer w20: 140,-2300 140,-2130 ; P1.13@140,-2230 210,-2230 ; 575,-2000 685,-2000 ; 675,-2230 825,-2230 ; 750,-2300 750,-2135
  other v2: 460,-2555 460,-2525 460,-2415 460,-2385 460,-2355 650,-2235 230,-2025 500,-1935 600,-1935 120,-1915 120,-1885 675,-1820 650,-1720 390,-1595 440,-1595 418,-1572 390,-1545 440,-1545 740,-1525
  other v4: 783.57,-663.05 735.34,-615.8 783.57,-615.8 735.34,-568.76 783.57,-568.56
  other v6: 735.34,-663.05
GPIO_0_CLKO: R28.2 U1.126 | length 591.2
  Top Layer w8: R28.2 2242,-1662 2305.46,-1598.54 U1.126
"GPIO_4/SLEEP WAKE": U1.20
GSM_PW: R33.2
GSM_RST: R34.2
HDMI_CEC_IN: U1.90
HDMI_CLKM: U1.100
HDMI_CLKP: U1.98
HDMI_D0M: U1.104
HDMI_D0P: U1.102
HDMI_D1M: U1.96
HDMI_D1P: U1.94
HDMI_D2M: U1.88
HDMI_D2P: U1.86
HDMI_HPD: U1.92
HPOUTL: P11.9
HPOUTR: P11.10
I2C1_SCL: U1.106 U6.20 | length 869
  Top Layer w8: U6.20@2409,-1943.16 2526.84,-1943.16 2541.68,-1928.32 U1.106
I2C1_SDA: U1.108 U6.18 | length 796.1
  Top Layer w8: U6.18@2410,-1891.98 2508.02,-1891.98 2518.05,-1881.95 U1.108
I2C2_SCL: U1.158
I2C2_SDA: U1.160
I2C3_SCL: U1.118
I2C3_SDA: U1.120
KEY_COL2/SD3_CD_B: U1.21
LCD_CTL: P4.48 R36.1
LINK_LED: R25.2
LVDS0_CLK_N: U1.141
LVDS0_CLK_P: U1.143
LVDS0_TX0_N: U1.133
LVDS0_TX0_P: U1.135
LVDS0_TX1_N: U1.145
LVDS0_TX1_P: U1.147
LVDS0_TX2_N: U1.131
LVDS0_TX2_P: U1.129
LVDS0_TX3_N: U1.137
LVDS0_TX3_P: U1.139
LVDS1_CLK_N: U1.146
LVDS1_CLK_P: U1.148
LVDS1_TX0_N: U1.136
LVDS1_TX0_P: U1.134
LVDS1_TX1_N: U1.130
LVDS1_TX1_P: U1.132
LVDS1_TX2_N: U1.144
LVDS1_TX2_P: U1.142
LVDS1_TX3_N: U1.138
LVDS1_TX3_P: U1.140
MIC: P11.11
MISO: P7.3 P8.3 U5.16
MOSI: P7.2 P8.2 U5.15
MX6_ONOFF: U1.37
NANDF_ALE: U1.150
NANDF_CLE: U1.152
NANDF_CS0: U1.11
NANDF_CS1: U1.13
NANDF_CS2: U1.15
NANDF_CS3: U1.155
NANDF_WP_B: U1.154
NetA1_1: A1.1 U8.39
NetC1_1: C1.1 P1.4 P1.5 R1.1 | length 285.7
  Top Layer w10: R1.1@432,-1892 432,-2064 P1.5@470,-2102
  Top Layer w12: R1.1 C1.1
NetC5_1: C5.1 C6.1 U2.6 | length 284.5
  Top Layer w10: U2.6 624.99,-1646.01 641,-1630 689,-1630 C6.1@694,-1625 ; C6.1@695,-1637 C5.1@695,-1589
NetC17_1: C17.1 Q2.3 U8.11
NetC20_1: C20.1 D2.2 L2.1 U3.8
NetC20_2: C20.2 U3.1
NetC23_1: C23.1 U5.20
NetC26_2: C26.2 P11.6 | length 159.3
  Top Layer w15: P11.6@3438.7,-1947 C26.2
NetD3_2: D3.2 R15.2 | length 60
  Top Layer w12: D3.2@4267,-1124 R15.2@4267,-1064
NetD4_2: D4.2 R16.2 | length 63
  Top Layer w10: D4.2 D4.2@4332,-1128
  Top Layer w12: D4.2@4332,-1118 R16.2@4332,-1058
NetD5_2: D5.2 R23.2
NetP1_10: P1.10 R7.1 | length 742.5
  Top Layer w10: R7.1@199,-1883 199,-1885 199,-2161 338,-2300 338,-2481 285,-2534 P1.10@285,-2546
NetP1_12: P1.12 R6.1 | length 802.7
  Top Layer w8: P1.12@700.99,-2542.99 P1.12
  Top Layer w10: R6.1 656,-1883 673,-1900 673,-2139 575,-2237 575,-2417 P1.12@700.99,-2542.99
NetP4_37: P4.37 R18.2 | length 328.2
  Top Layer w8: R18.2@1274,-397 1284,-387 1545,-387 1554.8,-377.2 P4.37
NetQ1_2: Q1.2 R33.1
NetQ1_3: Q1.3 U8.10
NetQ2_2: Q2.2 R34.1
NetR9_2: R9.2 U2.24 | length 89.8
  Top Layer w8: R9.2@250.21,-1618.21 U2.24
NetR11_1: R11.1 R12.1 U4.4
NetR13_1: R13.1 R14.1 U3.4
NetR19_1: R19.1 U2.5 | length 284.6
  Top Layer w8: U2.5@446,-1649 446,-1679 457,-1690 R19.1@695,-1690 ; U2.5@446.98,-1646.02 U2.5@447,-1645
NetR23_1: R23.1 U5.2
NetR25_1: R25.1 U8.13
NetR26_2: R26.2 U8.30
NetR29_2: R29.2 U8.29
NetR30_2: R30.2 U8.28
NetR31_1: R31.1 U8.22
NetR32_1: R32.1 U8.21
NetR35_1: R35.1 U8.20
NetR36_2: R36.2 U5.23
NRESET: C7.2 K1.3 K1.4 U1.39
PCIE_RXM: U1.76
PCIE_RXP: U1.74
PCIE_TXM: U1.80
PCIE_TXP: U1.78
RST: C22.1 P7.5 P8.5 R22.1 U5.29
SATA_RXN: U1.56
SATA_RXP: U1.54
SATA_TXN: U1.58
SATA_TXP: U1.60
SCK: P7.4 P8.4 U5.17
SCL: P4.43
SD1_CLK: U1.156
SD1_DAT0/CSI0_PWN: U1.17
SD1_DAT1/TOUCH_NEINT1: U1.151
SD1_DAT2/RTC_GPIO: U1.153
SD2_CLK: U1.46
SD2_CMD: U1.50
SD2_DATA0: U1.44
SD2_DATA1: U1.52
SD2_DATA2: U1.42
SD2_DATA3: U1.48
SD3_CLK: U1.59
SD3_CMD: U1.57
SD3_DATA0: U1.63
SD3_DATA1: U1.61
SD3_DATA2: U1.55
SD3_DATA3: U1.53
SD3_RST/SD3_WP: U1.19
SDA: P4.42
SIM_CLK: P10.3 R26.1
SIM_DAT: P10.7 R29.1
SIM_RST: P10.2 R30.1
SPKLN: P9.2 P11.13
SPKLP: P11.17
SPKRN: P9.1 P11.12
SPKRP: P11.16
STAT: R20.1 U8.12
UART1_RX: P3.1 U1.89
UART1_TX: P3.2 U1.91
UART2_CTS: U1.26
UART2_RTS: U1.28
UART2_RXD: U1.32 U5.31
UART2_TXD: U1.30 U5.30
UART3_CTS: U1.34
UART3_RTS: U1.36
UART3_RXD: R32.2 U1.40
UART3_TXD: R31.2 U1.38
UART4_RXD: U1.123
UART4_TXD: U1.121
UART5_RXD: U1.125
UART5_TXD: U1.127
USB_H1_OC: U1.73
USB_H1_PWR_EN: U1.67
USB_H1_VBUS: U1.75
USB_HOST_DN: U1.69
USB_HOST_DP: U1.71
USB_OTG_DN: U1.66
USB_OTG_DP: U1.68
USB_OTG_ID: U1.72
USB_OTG_OC: U1.62
USB_OTG_PWR_EN: U1.64
USB_OTG_VBUS: U1.70
VDD3.0: R35.2 U8.19
VSIM: P10.1 U8.27
WM8962_AUD3_RXD: P11.18 U6.7 | length 351.2
  Top Layer w8: U6.7 P11.18@2965.36,-1788.61
WM8962_AUD3_TXC: P11.20 U6.4 | length 385.5
  Top Layer w8: U6.4 2767.39,-1865.39 2848.74,-1946.74 P11.20
WM8962_AUD3_TXD: P11.19 U6.6 | length 374.1
  Top Layer w8: U6.6 2795.2,-1814.2 2849,-1868 P11.19
WM8962_AUD3_TXFS: P11.1 U6.5 | length 568.2
  Top Layer w8: U6.5 2780.8,-1839.8 2848,-1907 3030,-1907 3044.74,-1921.74 P11.1
WM8962_AUDIO_CLK: P11.5 U6.8 | length 1011.9
  Top Layer w8: U6.8 2770.98,-1763.02 2784,-1750 3335,-1750 3359.7,-1774.7 P11.5
WM8962_CODEC_I2C_CLK: P11.3 U6.1 | length 742
  Top Layer w8: U6.1 2723.16,-1942.16 2901,-2120 3178,-2120 3202.22,-2095.78 P11.3
WM8962_CODEC_I2C_DAT: P11.2 U6.3 | length 661.4
  Top Layer w8: U6.3 2715.98,-1890.98 2923,-2098 3113,-2098 3123.48,-2087.52 P11.2
WORK_LED: R20.2
pads on no net: P1. P1.7 P4.0 P4.34 P4.35 P4.36 P4.38 P4.39 P4.40 P4.41 P4.45 P4.46 P4.47 P4.49 P5.0 P10.0 P10.6 U1.0 U2.4 U3.2 U3.3 U3.5 U5.1 U5.7 U5.8 U5.9 U5.10 U5.13 U5.14 U5.19 U5.22 U5.24 U5.25 U5.26 U5.27 U5.28 U5.32 U6.9 U6.12 U7.4 U8.2 U8.3 U8.4 U8.5 U8.6 U8.7 U8.8 U8.9 U8.14 U8.15 U8.16 U8.17 U8.18 U8.23 U8.24 U8.25 U8.26 U8.32 U8.41 U8.42
copper on no net:
  other v7: 102,-170

## Keep-outs
Keep-Out Layer:
  lines w8: 0,-2790 4453.77,-2790 4453.77,-209.77 4440,-196 2091,-196 1301,-196 1301,-90 895,-90 895,-220 465,-220 465,-87 0,-87 0,-2790

## Other copper
Top Layer:
  rectangle net GND: 490,-1845 505,-1825
Bottom Layer:
  rectangle net GND: 380,-1615 455,-1525

## Silkscreen, mask and mechanical layers (free items; w line width, h text height)
Top Overlay:
  text "OPD20M-V1.0" at 3875,1785 h120
  text "MO" at 2860,665 h30
  text "MI" at 2970,665 h30
  text "CK" at 3055,665 h30
  text "RS" at 3160,665 h30
  text "TX" at 2490,285 h30
  text "RX" at 2620,255 h30

## Text inside footprints (layer, text, board x,y; h text height)
C9: Top Overlay "+" at 7775,-3119 h59.06 r90
U1: Top Overlay "200" at 1407,-963 h39.37 r90; Top Overlay "1" at 3977,-875 h39.37 r180